# Altium PCB SL6243A.PcbDoc
Units mil, origin at the board's own origin, x right, y up, seen from the top; angles counter-clockwise.
Board outline 669 x 2204 mil, 2 copper layers (Top Layer, Bottom Layer); 20 components, 21 nets, 81 pads, 15 vias.
Unrouted connection lines stored in the file: 17.
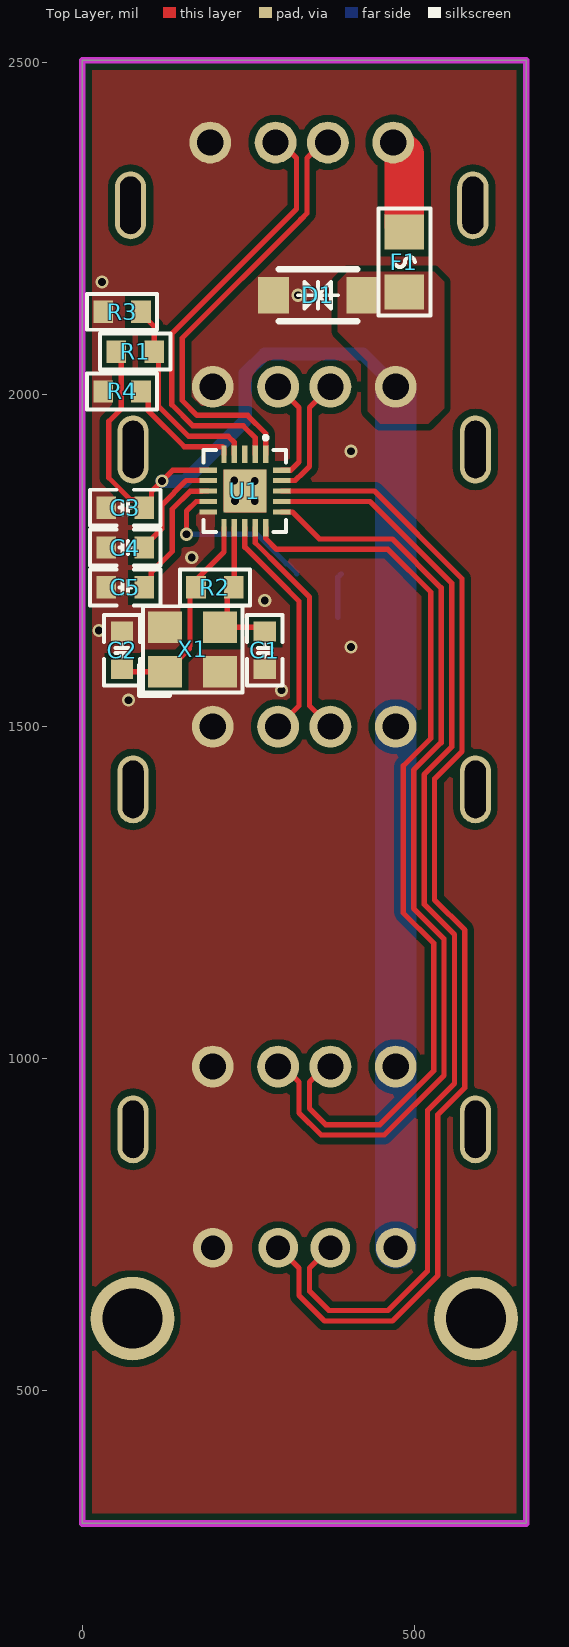
[diagram p0: Top Layer view]
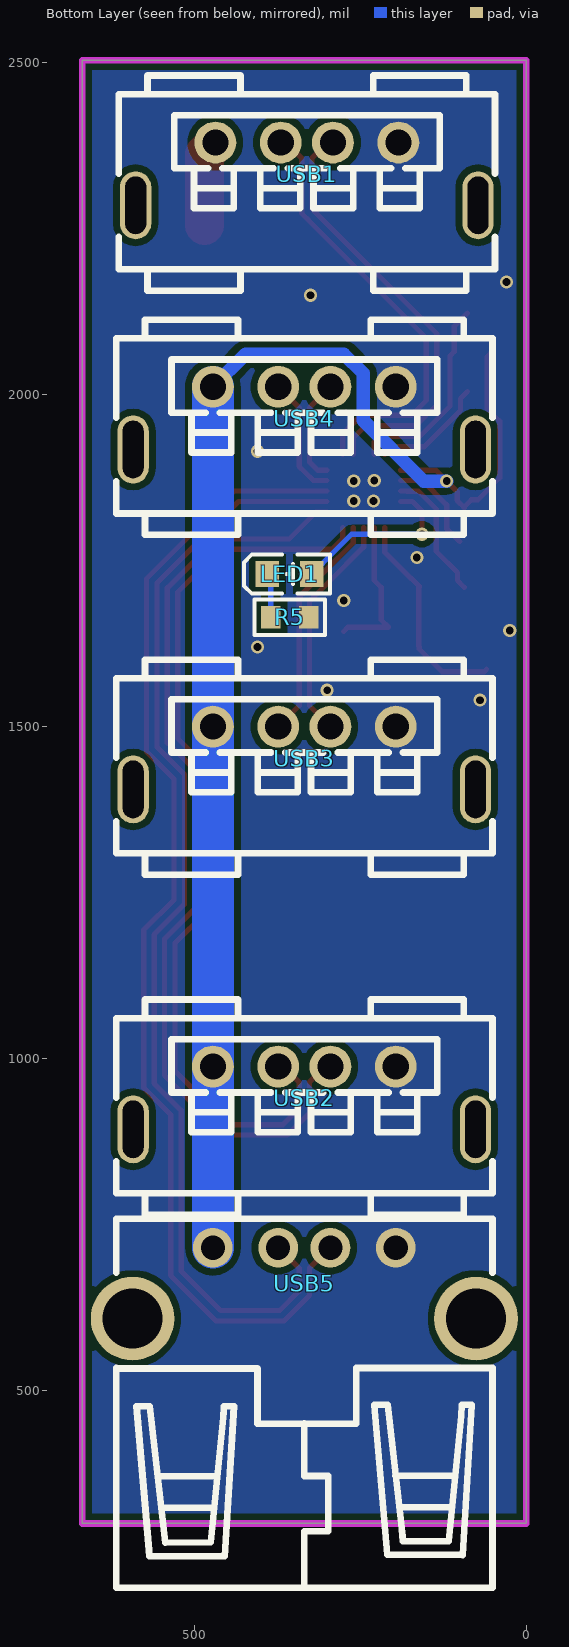
[diagram p1: Bottom Layer view, seen from below]
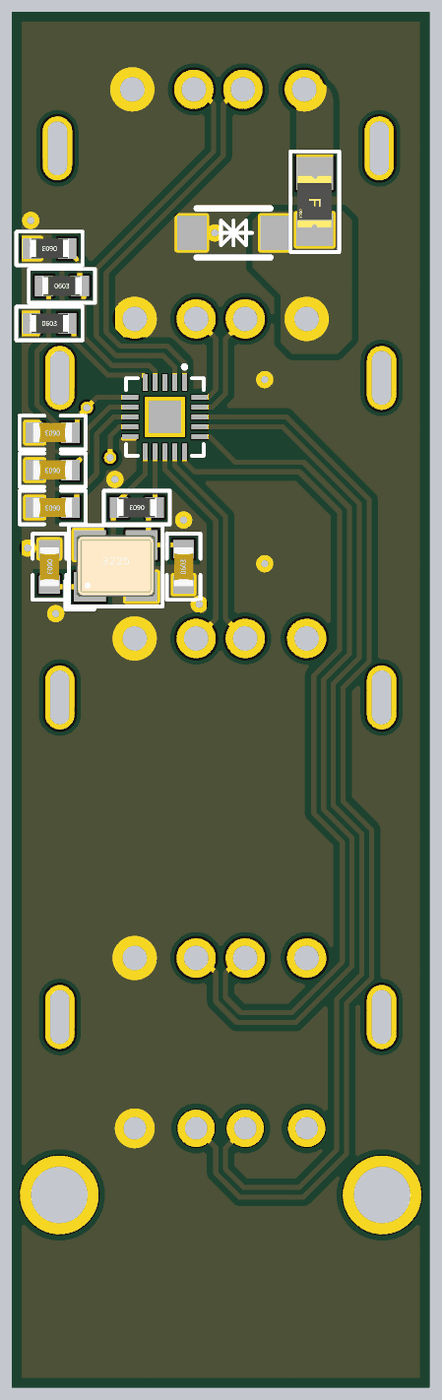
[diagram p2: 3D render of the assembled board from above, using the file's embedded part models]

## Layer stack, top to bottom
Top Solder: solder mask 0.4, Solder Resist, Dk 3.5
Top Layer: signal copper 1.4
Dielectric 1: dielectric 12.6, FR-4, Dk 4.8
Bottom Layer: signal copper 1.4
Bottom Solder: solder mask 0.4, Solder Resist, Dk 3.5

## Board outline
0,300 669,300 669,2504 0,2504

## Design rules (kind name [scope] priority, off if disabled: settings)
Clearance Clearance_1 [InPolygon] p1: gap=10 ignorepadtopadclearanceinfootprint=TRUE
Clearance [All] p2: gap=7.7 ignorepadtopadclearanceinfootprint=TRUE
DiffPairsRouting [All] p1: maxlimit=7.7 minlimit=7.7 mostfreqgap=7.7 toplayer_minwidth=8 toplayer_maxwidth=8 toplayer_prefwidth=8 bottomlayer_minwidth=8 bottomlayer_maxwidth=8 bottomlayer_prefwidth=8 maxuncoupledlength=500
PolygonConnect [All] p1: connectstyle=Direct reliefconductorwidth=10 reliefentries=4 polygonreliefangle="90 Angle" airgapwidth=10
RoutingVias [All] p1: holewidth=11.81 width=19.68 viastyle="Through Hole" minholewidth=11.81 minwidth=19.68 maxholewidth=11.81 maxwidth=19.68
SolderMaskExpansion [All] p1: expansion=4 istentingtop=FALSE
Width [All] p1: maxlimit=100 minlimit=8 preferedwidth=10
29 further rules are at their usual default settings.

## Classes and differential pairs
differential pair UP_D: +UP_D_P -UP_D_N
differential pair P4_D: +P4_D_P -P4_D_N
differential pair P3_D: +P3_D_P -P3_D_N
differential pair P2_D: +P2_D_P -P2_D_N
differential pair P1_D: +P1_D_P -P1_D_N

## Components (designator, comment, footprint, x,y, rotation, side; value= is the part's Value field where it differs from the comment)
C1 "22pF 5% 50V" C0603_L 275,1615 r90 top
C2 "22pF 5% 50V" C0603_L 60,1615 r270 top
C3 "4.7uF 10% 16V" C0603_L 65,1830 r180 top
C4 "4.7uF 10% 16V" C0603_L 65,1770 r180 top
C5 "4.7uF 10% 16V" C0603_L 65,1710 r180 top
D1 "smfj6.0ca_c151891" SOD-123FL_L2.8-W1.8-LS3.7-BI 355,2150 r0 top
F1 "6V 1A" F0805 485,2200 r270 top
LED1 "蓝色" LED0603-FD 356.54,1730 r0 bottom
R1 "4.7K 5%" R0603_L 80,2065 r0 top
R2 "1M 5%" R0603_L 200,1710 r180 top
R3 "10K 5%" R0603_L 60,2125 r180 top
R4 "4.7K 5%" R0603_L 60,2005 r0 top
R5 "10k 5%" R0603_L 356.46,1665 r0 bottom
U1 "SL6243A" QFN-20_L3.0-W3.0-P0.40-BL-EP1.7 245,1855 r180 top
USB1 "af 180°zjb13.7" USB-A-TH_AF-ZJB13.7 330.6,2332.8 r180 bottom locked
USB2 "af 180°zjb13.7" USB-A-TH_AF-ZJB13.7 334.4,941 r180 bottom locked
USB3 "af 180°zjb13.7" USB-A-TH_AF-ZJB13.7 334.4,1453 r180 bottom locked
USB4 "af 180°zjb13.7" USB-A-TH_AF-ZJB13.7 334.4,1965 r180 bottom locked
USB5 "af 90° wjdg" USB-A-TH_AF-WJDG 334.4,662 r180 bottom locked
X1 "12MHz" OSC-3225-4P 166.34,1616.54 r0 top

## Footprints (in the part's own frame and the unit in brackets; to place one, negate y for a bottom-side part, rotate by r counter-clockwise, add the part's x,y. Pads: shape width x height; smd on the part's side, far side on the other; paste and mask are expansions set on the pad)
C0603_L [mm] "贴片MLCC电容"
  rect 0.75x0.85 smd: 1(-0.725,0) 2(0.725,0)
  silkscreen extent -1.35,-0.69 1.35,0.69, body extent -0.8,-0.4 0.8,0.4, height 0.8
F0805 [mm] "0805贴片自恢复保险丝(PPTC)   联系卖家 免费查找封装"
  rect 1.335x1.5 smd: 1(-1.142,0) 2(1.142,0)
  silkscreen extent -2.05,-0.97 2.05,1, body extent -1.05,-0.7 1.05,0.7, height 0.8
LED0603-FD [mm]
  rect 0.9x1 smd: 1(-0.85,0) 2(0.85,0)
  silkscreen extent -1.55,-0.75 1.75,0.75
OSC-3225-4P [mm] "3.2*2.5*0.7mm(长宽高)                             淘宝ID:黄晶宝石"
  rect 1.3x1.2 smd: 1(-1.05,-0.85) 2(1.05,-0.85) 3(1.05,0.85) 4(-1.05,0.85)
  silkscreen extent -2.03,-1.75 1.91,1.65, body extent -1.6,-1.25 1.6,1.25, height 0.7
QFN-20_L3.0-W3.0-P0.40-BL-EP1.7 [mil]
  rect 7.9x26.2 smd paste-3937 mask+2: 1(-31.5,-55.4) 2(-15.7,-55.4) 3(0,-55.4) 4(15.8,-55.4) 5(31.5,-55.4) 11(31.5,55.4) 12(15.8,55.4) 13(0,55.4) 14(-15.7,55.4) 15(-31.5,55.4)
  rect 26.2x7.9 smd paste-3937 mask+2: 6(55.4,-31.5) 7(55.4,-15.8) 8(55.4,0) 9(55.4,15.7) 10(55.4,31.5) 16(-55.4,31.5) 17(-55.4,15.7) 18(-55.4,0) 19(-55.4,-15.8) 20(-55.4,-31.5)
  rect 65x65 smd paste-3937 mask+2: 21(0,0)
  silkscreen extent -62,-83 62,62
R0603_L [mm] "1/10W贴片电阻"
  rect 0.75x0.85 smd: 1(-0.725,0) 2(0.725,0)
  silkscreen extent -1.35,-0.69 1.35,0.69, body extent -0.8,-0.4 0.8,0.4, height 0.4
SOD-123FL_L2.8-W1.8-LS3.7-BI [mm]
  rect 1.2x1.4 smd: 1(-1.7,0) 2(1.7,0)
  silkscreen extent -1.5,-1 1.5,1
USB-A-TH_AF-WJDG [mil]
  round 59.8 hole 36.2 paste-99999 mask+2: 1(-137.8,53.3) 2(-39.4,53.3) 3(39.3,53.3) 4(137.7,53.3)
  round 126 hole 90.6 paste-99999 mask+2: 5(-258.7,-53.4) 5(258.6,-53.4)
  silkscreen extent -284,-459 283,97
USB-A-TH_AF-ZJB13.7 [mil]
  round 63 hole 39.4: 1(-137.8,47.2) 2(-39.4,47.2) 3(39.3,47.2) 4(137.8,47.2)
  oval 47.2x102.4 hole 31.5 slot 86.6 at 90 deg: 5(-257.9,-47.3) 5(257.8,-47.3)
  silkscreen extent -284,-176 283,148

## Part data
C1 C2 C3 C4 C5: library part C, "贴片电容", BOM名称=无极性贴片电容, 优秀评价可免费更新=联系淘宝ID：黄晶宝石，获取更新版封装库, 卖家免费技术支持，联系售后=唯一出售店铺网址https://shop463601444.taobao.com, 本封装库来自淘宝卖家 ID：黄晶宝石=其他店铺购入均为盗版，请立即申请退款
D1: "极性:双向;反向截止电压(Vrwm):6V;钳位电压:10.3V;峰值脉冲电流(Ipp):19.4A@10/1000us;峰值脉冲功率(Ppp):200W@10/1000us;击穿电压:7.37V;", Clamping Voltage=10.3V, JLCPCB Part Class="Extended Part", LCSC Part Name="双向TVS 6V截止 峰值浪涌电流：19.4A@10/1000us", Manufacturer=BORN(伯恩半导体), ManufacturerPart=SMFJ6.0CA, Peak Pulse Current (Ipp)=19.4A@10/1000us, Peak Pulse Power Dissipation (Ppp)=200W@10/1000us, Reverse Leakage Current (Ir)=100uA, Reverse Stand-Off Voltage (Vrwm)=6V, Voltage - Breakdown=7.37V, AddInBom=yes, ConvertToPcb=yes, Datasheet=https://item.szlcsc.com/datasheet/SMFJ6.0CA/163231.html, FootprintName=SOD-123FL_L2.8-W1.8-LS3.7-BI, ModelId=d105299b3871451c86f679efef28ff8f, ModelName=SOD-123FL_L2.8-W1.8-LS3.7-BI, ModelTransform=145.669,70.866,0,0,0,0,0,0,0, Polarity=双向, Supplier=LCSC, Supplier Footprint=SOD-123FL, SupplierPart=C151891, Symbol=SMFJ6.0CA, Type=TVS
F1: library part "FUSE 1808", "0805自恢复保险座", BOM名称=1808保险座, 当前库版本V2023.10.25 @淘宝卖家:黄晶宝石=最新版本发布https://item.taobao.com/item.htm?id=566775463719
LED1: library part LED, "贴片LED", BOM名称=贴片LED, 封装库来自淘宝卖家：黄晶宝石=其他店铺购入均为盗版封装库，无更新权益，请立即申请退款，本店现金奖励200~1000元
R1 R2 R3 R4 R5: library part R, "贴片电阻", BOM名称=贴片电阻, 优秀评价可免费更新=联系淘宝ID：黄晶宝石，获取更新版封装库, 卖家免费技术支持，联系售后=唯一出售店铺网址https://shop463601444.taobao.com, 本封装库来自淘宝卖家 ID：黄晶宝石=其他店铺购入均为盗版，请立即申请退款
USB1 USB2 USB3 USB4: "连接器类型:Type-A;标准:USB 2.0;公母:母;安装方式:直插;触点数量:4P;端口数量:1;额定电流 - 电源:1.5A;工作温度范围:-25℃~+85℃;", Core Colour=白色, Current Rating - Power (Max)=1.5A, JLCPCB Part Class="Extended Part", LCSC Part Name="Type-A 母 直插", Manufacturer="SHOU HAN(首韩)", ManufacturerPart="AF 180°ZJB13.7", Operating Temperature Range=-25℃~+85℃, Rated Voltage (Max)=30V, AddInBom=yes, Center Height=-, Connect-Disconnect Life=5千次, Connector Type=Type-A, ConvertToPcb=yes, Datasheet=https://atta.szlcsc.com/upload/public/pdf/source/20241125/3F1287FBF237B0DC4F79F9BB9BA7EB30.pdf, FootprintName=USB-A-TH_AF-ZJB13.7, Gender=母, Length=13.7mm, ModelId=c3dea282a4a445c4ae65c8aa64bfab47, ModelName=USB-A-TH_AF-ZJB13.7, ModelTransform=562.991,271.653,0,0,0,0,0,3.78,-188.976, Mounting Style=直插, Number of Contacts=4P, Number of Ports=1, Standard="USB 2.0", Supplementary Features=-, Supplier=LCSC, Supplier Footprint=插件, SupplierPart=C456015, Symbol="AF 180°ZJB13.7"
USB5: "连接器类型:Type-A;协议标准:USB 2.0;公母:母;安装方式:弯插;触点数量:4P;端口数量:1;额定电流 - 电源:1.5A;工作温度:-25℃~+85℃;", Current Rating-Power=1.5A, Detection color=白色, JLCPCB Part Class="Extended Part", LCSC Part Name="Type-A 母 弯插", Manufacturer="SHOU HAN(首韩)", ManufacturerPart="AF 90° WJDG", Operating Temperature=-25℃~+85℃, Voltage Rating=30V, AddInBom=yes, Center Height=-, Connect-Disconnect Life=5千次, Connector Type=Type-A, ConvertToPcb=yes, Datasheet=https://item.szlcsc.com/datasheet/AF%252090%25C2%25B0%2520WJDG/458825.html, FootprintName=USB-A-TH_AF-WJDG, Gender=母, Length=14mm, ModelId=268f7f19b8674295a50f5e7a4a3dee80, ModelName=USB-A-TH_4P-L14.5-W14.0-H7.6-S2.71, ModelTransform=610.19406,551.18,0,0,0,0,0,-192.915,-149.606, Mounting Type=弯插, Number of Contacts=4P, Number of Ports=1, Protocol Standard="USB 2.0", Supplementary Features=-, Supplier=LCSC, Supplier Footprint=弯插, SupplierPart=C456018, Symbol="AF 90° WJDG"
X1: library part XTAL-4P, "4脚无源晶振", BOM名称=4脚无源晶振, 优秀评价可免费更新=联系淘宝ID：黄晶宝石，获取更新版封装库, 卖家免费技术支持，联系售后=唯一出售店铺网址https://shop463601444.taobao.com, 封装库来自淘宝卖家 ID：黄晶宝石=其他店铺购入均为盗版，请立即申请退款, 版权归属="封装库来自淘宝卖家 ID：黄晶宝石"
U1: Symbol=SL6243A

## Via types
v1: diameter 19.68, hole 11.81, Top Layer to Bottom Layer, 15 vias

## Nets (pads, with @x,y where several pads share a name; then routed paths per layer and width w, separated by ;. In a path a pad name is that pad's centre, name@x,y a point inside that pad or via, vN(x,y) a via of type N, cw(c..) or ccw(c..) an arc to the next point about the centre after c; other vN are vias at no path point)
GND: C1.1 C2.1 C3.2 C4.2 C5.2 D1.1 R3.2 R4.1 R5.1 U1.10 U1.21 USB1.4 USB2.4 USB3.4 USB4.4 USB5.4 X1.2 X1.4
  other v1: 70,1540 300,1555 405,1620 25,1645 275,1690 165,1755 230,1840 260,1840 260,1870 229.1,1870.9 405,1915 325,2150 30,2170
NetC1_2: C1.2 R2.1 U1.12 X1.3 | length 228.5
  Top Layer w8: U1.12 229.2,1720.66 218.54,1710 218.54,1660.87 X1.3 268.54,1650 C1.2
NetC2_2: C2.2 R2.2 U1.11 X1.1 | length 319.8
  Top Layer w8: C2.2 63.39,1583.07 X1.1 126.97,1583.07 161.46,1617.56 161.46,1620.7 162.29,1621.53 162.29,1709.17 R2.2@161.46,1710 ; R2.2@161.46,1711.97 172.22,1722.73 172.85,1722.73 213.5,1763.38 U1.11
NetC4_1: C4.1 U1.7 | length 148.1
  Top Layer w8: C4.1@100.54,1778.97 120.01,1798.43 120.01,1834.26 156.55,1870.8 U1.7
NetC5_1: C5.1 U1.8 | length 200.4
  Top Layer w8: C5.1 103.8,1720.25 103.8,1732.21 135.71,1764.12 135.71,1827.76 162.9,1854.95 180.5,1854.95 180.55,1855 U1.8
NetF1_1: F1.1 USB1.1 | length 131.9
  Top Layer w59: USB1.1 468.4,2378.92 485,2362.32 F1.1@485,2255
NetLED1_1: LED1.1 U1.9 | length 265
  Top Layer w8: v1(157.25,1790) 157.25,1824.75 171.75,1839.25 189.55,1839.25 U1.9
  Bottom Layer w8: v1(157.25,1790) 263.07,1790 307.38,1745.68 309.36,1745.68 323.07,1731.97 LED1.1
NetLED1_2: LED1.2 R5.2 | length 67.1
  Bottom Layer w8: R5.2 385,1725 LED1.2
NetR1_2: R1.2 R3.1 U1.4 | length 305.9
  Top Layer w8: R3.1@88.54,2123.03 108.54,2103.03 R1.2 115.01,2058.54 115.01,1982.79 160.2,1937.6 219.9,1937.6 229.15,1928.35 229.15,1916.95 229.2,1916.9 U1.4
NetR4_2: R4.2 U1.5 | length 180
  Top Layer w8: R4.2 99.31,1994.24 99.31,1976.29 153.69,1921.9 211.05,1921.9 213.45,1919.5 213.45,1910.45 U1.5
P1_D_N: U1.19 USB4.2 | length 183.8
  Top Layer w8: U1.19 320.8,1870.8 333.1,1883.1 342.3,1892.3 342.3,1980.7 USB4.2
P1_D_P: U1.20 USB4.3 | length 157.7
  Top Layer w8: USB4.3 326.6,1980.7 326.6,1898.8 314.3,1886.5 U1.20
P2_D_N: U1.17 USB5.2 | length 1695.1
  Top Layer w8: U1.17 433.5,1839.3 556.4,1716.4 556.4,1469.52 515,1428.12 515,1232.8 560.7,1187.1 560.7,962.9 534.2,936.4 524.6,926.8 520,922.2 520,680 460.7,620.7 371.5,620.7 342.3,649.9 342.3,684.71 363.43,705.84 363.43,715.3 USB5.2
P2_D_P: U1.18 USB5.3 | length 1773.2
  Top Layer w8: USB5.3 305.47,715.3 305.47,705.84 326.6,684.71 326.6,643.4 365,605 467.2,605 535.7,673.5 535.7,915.7 576.4,956.4 576.4,1193.6 530.7,1239.3 530.7,1421.62 572.1,1463.02 572.1,1722.9 440,1855 U1.18
P3_D_N: U1.15 USB2.2 | length 1367
  Top Layer w8: U1.15 276.5,1783.5 292.85,1767.15 460.65,1767.15 525,1702.8 525,1482.53 483.6,1441.13 483.6,1219.79 529.3,1174.09 529.3,981.5 448.5,900.7 366.5,900.7 342.3,924.9 342.3,964.81 365.69,988.2 USB2.2
P3_D_P: U1.16 USB2.3 | length 1415.1
  Top Layer w8: USB2.3 303.21,988.2 326.6,964.81 326.6,918.4 360,885 455,885 545,975 545,1180.59 499.3,1226.29 499.3,1434.63 540.7,1476.03 540.7,1709.3 467.15,1782.85 357.15,1782.85 316.5,1823.5 U1.16
P4_D_N: U1.14 USB3.2 | length 346.2
  Top Layer w8: U1.14 260.7,1777.1 303.4,1734.4 342.3,1695.5 342.3,1531.7 USB3.2
P4_D_P: U1.13 USB3.3 | length 346.2
  Top Layer w8: U1.13 245,1770.59 296.9,1718.7 326.6,1688.99 326.6,1531.7 USB3.3
UP_D_N: U1.1 USB1.2 | length 661.8
  Top Layer w8: U1.1 276.45,1910.45 276.45,1941.7 249.15,1969 173.2,1969 150.71,1991.5 150.71,2085.71 329.3,2264.3 338.5,2273.5 338.5,2356.61 361.89,2380 USB1.2
UP_D_P: U1.2 USB1.3 | length 661.8
  Top Layer w8: U1.2 260.75,1910.45 260.75,1935.2 242.65,1953.3 166.7,1953.3 135.01,1984.99 135.01,2092.21 322.8,2280 322.8,2356.61 299.41,2380 USB1.3
Vusb: C3.1 D1.2 F1.2 R1.1 U1.6 USB2.1 USB3.1 USB4.1 USB5.1 | length 2191.7
  Top Layer w8: R1.1 58.92,2057.54 58.92,1978.96 40,1960.04 40,1875 73.04,1841.96 82.78,1841.96 93.54,1831.2 C3.1 104.31,1840.76 104.31,1854.31 136.5,1886.5 U1.6
  Bottom Layer w20: v1(120,1870) 154.5,1870 245.8,1961.3 245.8,2032.48 274.72,2061.4 423,2061.4 USB4.1
  Bottom Layer w63: USB5.1 USB2.1 USB3.1 USB4.1
pads on no net: U1.3 USB1.5 USB2.5 USB3.5 USB4.5 USB5.5

## Polygon pours and split planes (outlines as drawn)
GND on Top Layer "GND_L01_P001" (solid, remove dead copper, pour order 1): 0,300 669,300 669,2504 0,2504
Vusb on Top Layer "VUSB_L01_P000" (solid, remove dead copper, pour order 0): 400,2185 385,2170 385,2095 430,2050 430,1975 448.8,1956.2 521.2,1956.2 545,1980 545,2170 530,2185
GND on Bottom Layer "GND_L02_P002" (solid, remove dead copper, pour order 2): 0,300 669,300 669,2504 0,2504

## Keep-outs
Keep-Out Layer:
  the board outline again, w10